# EAGLE board converter adapter - Copy (EAGLE 6.4)
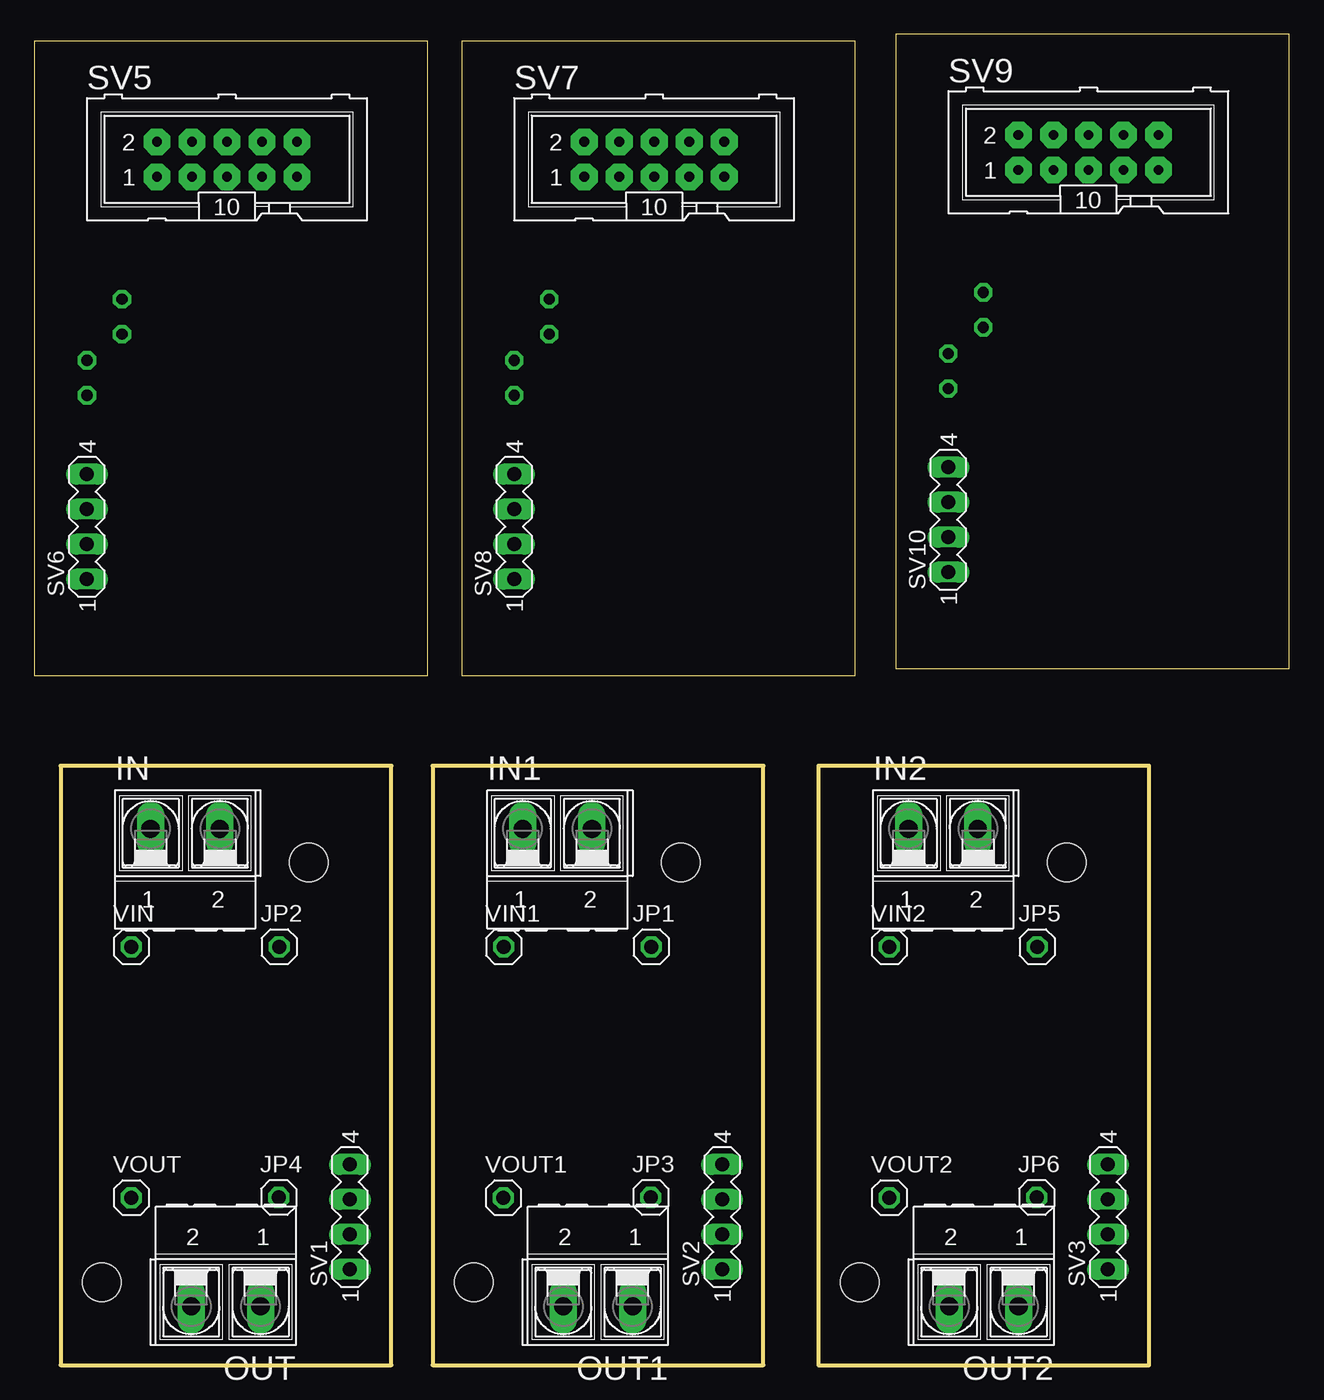
[diagram p0: board, top side]
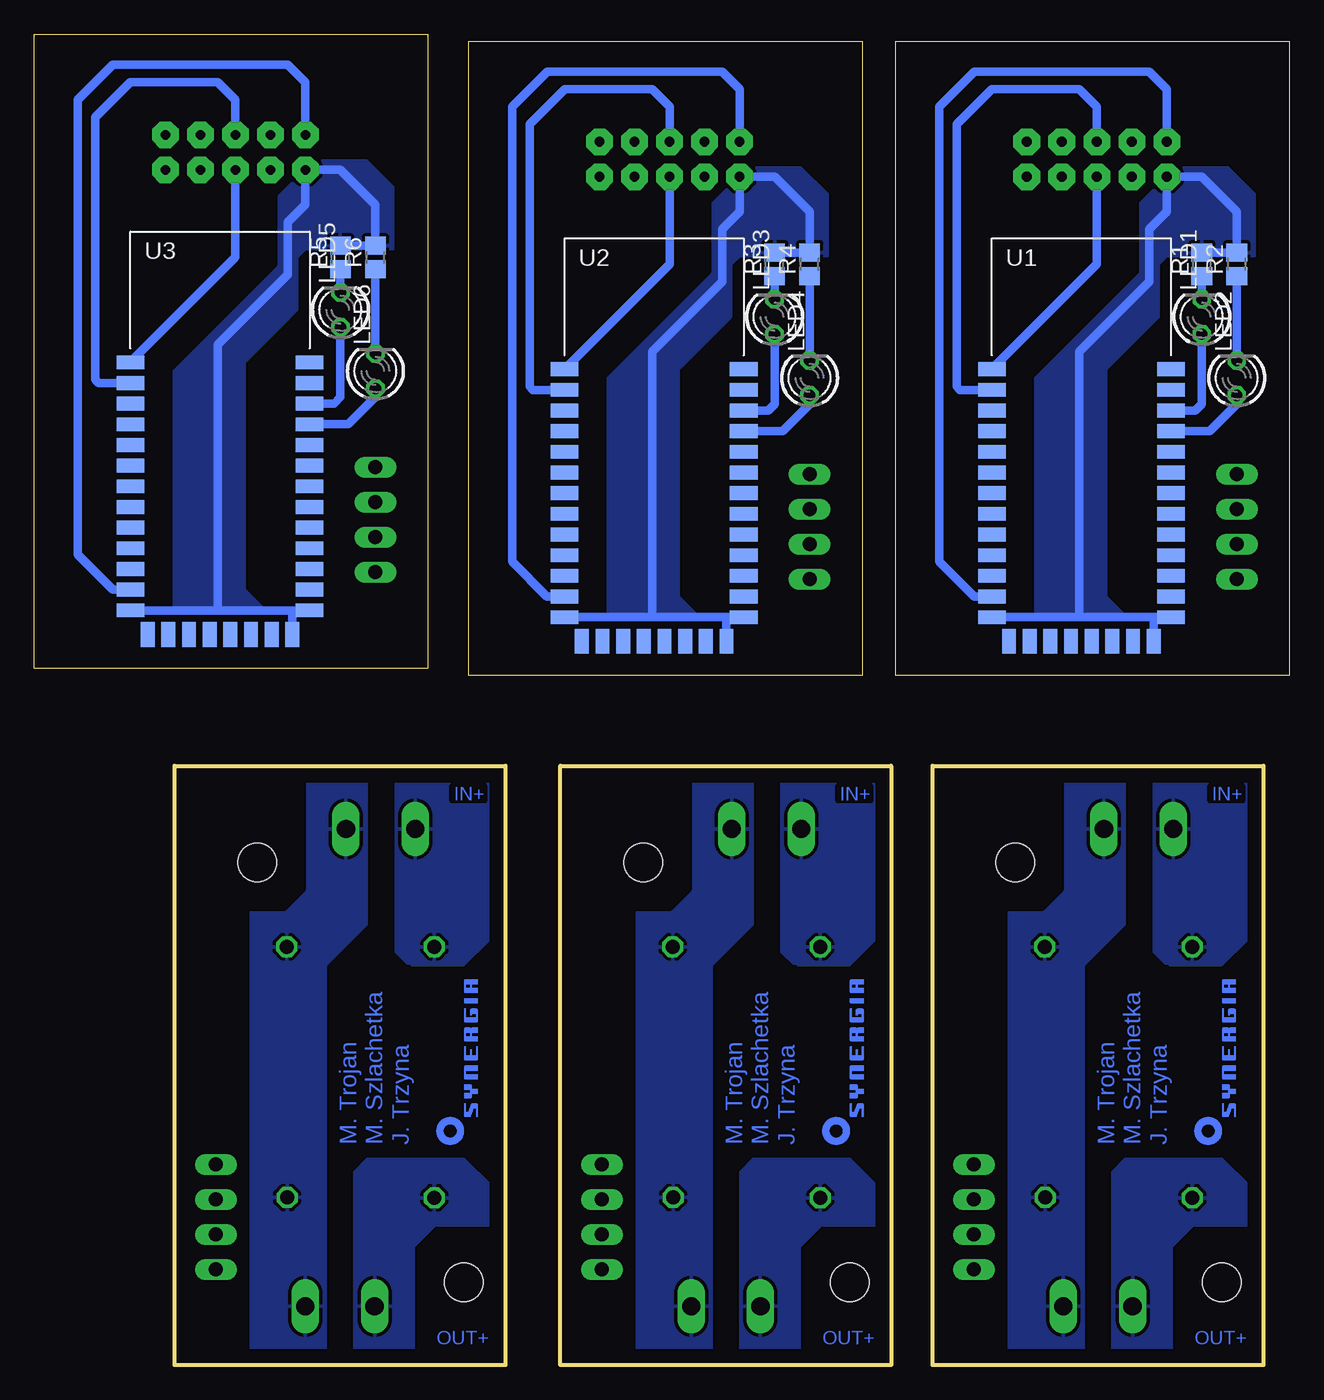
[diagram p1: board, bottom side, seen from below]

Size 91.06 x 96.58 mm. Coordinates in mm from the lower left corner, seen from the top.
Outline: 1.89,0 25.89,0 25.89,43.5 1.89,43.5 1.89,0
Outline: 28.89,0 52.89,0 52.89,43.5 28.89,43.5 28.89,0
Outline: 56.89,0 80.89,0 80.89,43.5 56.89,43.5 56.89,0
Outline: 0,50.06 28.55,50.06 28.55,96.08 0,96.08 0,50.06
Outline: 31,50.06 59.55,50.06 59.55,96.08 31,96.08 31,50.06
Outline: 62.5,50.56 91.06,50.56 91.06,96.58 62.5,96.58 62.5,50.56
Copper layers (1*16): Top 0.035mm / dielectric 1.5mm / Bottom 0.035mm
Design rules "default": minimum track width 10mil, minimum drill 24mil, track to track 8mil, track to pad 8mil, pad to pad 8mil, via to via 8mil, smd to smd 8mil, copper to edge 40mil, drill to drill 8mil, minimum pad ring 10mil, minimum via ring 8mil, stop-mask expansion 4mil, vias tented up to drill 0mil, thermal gap 10mil
Holes 2.8 mm at 4.89,6 19.89,36.5 31.89,6 46.89,36.5 59.89,6 74.89,36.5

## Footprints (pad centres in the part's own frame; a part is rotated, then mirrored left to right if it is on the bottom)
AK500/2-H = drill 1.321 long: 1 -2.515,0; 2 2.515,0
1X01 = drill 1.016 octagon: 1 0,0
LED3MM = drill 0.813 octagon: A -1.27,0; K 1.27,0
R0805 = smd 1.3 x 1.5: 1 -0.85,0; 2 0.85,0
MA04-1 = drill 1.016 long: 1 -3.81,0; 2 -1.27,0; 3 1.27,0; 4 3.81,0
ML10 = drill 0.7 pad 1.93 octagon: 1 -5.08,-1.27; 2 -5.08,1.27; 3 -2.54,-1.27; 4 -2.54,1.27; 5 0,-1.27; 6 0,1.27; 7 2.54,-1.27; 8 2.54,1.27; 9 5.08,-1.27; 10 5.08,1.27
BLUETOOTH_SMD = smd 2 x 1: 1 0,0; 2 0,-1.5; 3 0,-3; 4 0,-4.5; 5 0,-6; 6 0,-7.5; 7 0,-9; 8 0,-10.5; 9 0,-12; 10 0,-13.5; 11 0,-15; 12 0,-16.5; 13 0,-18; 22 13,-18; 23 13,-16.5; 24 13,-15; 25 13,-13.5; 26 13,-12; 27 13,-10.5; 28 13,-9; 29 13,-7.5; 30 13,-6; 31 13,-4.5; 32 13,-3; 33 13,-1.5; 34 13,0 | smd 1 x 1.8: 14 1.25,-19.75; 15 2.75,-19.75; 16 4.25,-19.75; 17 5.75,-19.75; 18 7.25,-19.75; 19 8.75,-19.75; 20 10.25,-19.75; 21 11.75,-19.75

## Placement (x,y rotation side)
IN  [AK500/2-H]  10.94,38.92 0 top
IN1  [AK500/2-H]  37.94,38.92 0 top
IN2  [AK500/2-H]  65.94,38.92 0 top
JP1  [1X01]  44.75,30.36 0 top
JP2  [1X01]  17.75,30.36 0 top
JP3  [1X01]  44.72,12.16 0 top
JP4  [1X01]  17.72,12.16 0 top
JP5  [1X01]  72.75,30.36 0 top
JP6  [1X01]  72.72,12.16 0 top
LED1  [LED3MM]  6.35,76.09 90 bottom
LED2  [LED3MM]  3.81,71.65 90 bottom
LED3  [LED3MM]  37.35,76.09 90 bottom
LED4  [LED3MM]  34.81,71.65 90 bottom
LED5  [LED3MM]  68.85,76.59 90 bottom
LED6  [LED3MM]  66.31,72.15 90 bottom
OUT  [AK500/2-H]  13.89,4.26 180 top
OUT1  [AK500/2-H]  40.89,4.26 180 top
OUT2  [AK500/2-H]  68.89,4.26 180 top
R1  [R0805]  6.35,79.91 90 bottom
R2  [R0805]  3.81,79.91 90 bottom
R3  [R0805]  37.35,79.91 90 bottom
R4  [R0805]  34.81,79.91 90 bottom
R5  [R0805]  68.85,80.41 90 bottom
R6  [R0805]  66.31,80.41 90 bottom
SV1  [MA04-1]  22.89,10.75 90 top
SV2  [MA04-1]  49.89,10.75 90 top
SV3  [MA04-1]  77.89,10.75 90 top
SV5  [ML10]  13.97,87.53 0 top
SV6  [MA04-1]  3.81,60.85 90 top
SV7  [ML10]  44.97,87.53 0 top
SV8  [MA04-1]  34.81,60.85 90 top
SV9  [ML10]  76.47,88.03 0 top
SV10  [MA04-1]  66.31,61.35 90 top
U1  HC_05  [BLUETOOTH_SMD]  21.59,72.28 0 bottom
U2  HC_05  [BLUETOOTH_SMD]  52.59,72.28 0 bottom
U3  HC_05  [BLUETOOTH_SMD]  84.09,72.78 0 bottom
U$1  [SYNERGIA_12MM]  3.89,16 90 bottom
U$2  [SYNERGIA_12MM]  30.89,16 90 bottom
U$3  [SYNERGIA_12MM]  58.89,16 90 bottom
VIN  [1X01]  7.04,30.36 0 top
VIN1  [1X01]  34.04,30.36 0 top
VIN2  [1X01]  62.04,30.36 0 top
VOUT  [1X01]  7.03,12.14 0 top
VOUT1  [1X01]  34.03,12.14 0 top
VOUT2  [1X01]  62.03,12.14 0 top

## Library data of the parts
IN IN1 IN2 OUT OUT1 OUT2 = con-ptr500; OC_FARNELL: unknown; OC_NEWARK: unknown
JP1-JP6 VIN VIN1 VIN2 VOUT VOUT1 VOUT2 = pinhead
LED1-LED6 = led
R1-R6 = resistor
SV1-SV3 SV6 SV8 SV10 = con-lstb; OC_FARNELL: unknown; OC_NEWARK: unknown
SV5 SV7 SV9 = con-harting-ml; OC_FARNELL: unknown; OC_NEWARK: unknown
U1-U3 = SerialPortBluetooth
U$1-U$3 = synergia_logo

## Nets
+3V1: SV5.2 U1.12
+3V2: SV7.2 U2.12
+3V3: SV9.2 U3.12
GND: IN.2 JP2.1 JP4.1 OUT.1
GND1: IN1.2 JP1.1 JP3.1 OUT1.1
GND2: IN2.2 JP5.1 JP6.1 OUT2.1
GND4: R1.2 R2.2 SV5.1 U1.13 U1.21 U1.22
GND5: R3.2 R4.2 SV7.1 U2.13 U2.21 U2.22
GND6: R5.2 R6.2 SV9.1 U3.13 U3.21 U3.22
N$1: OUT.2 VOUT.1
N$4: IN.1 VIN.1
N$5: OUT1.2 VOUT1.1
N$6: IN1.1 VIN1.1
N$9: OUT2.2 VOUT2.1
N$10: IN2.1 VIN2.1
N$17: SV5.5 U1.1
N$18: SV5.6 U1.2
N$19: LED2.A U1.31
N$20: LED1.A U1.32
N$21: LED1.K R1.1
N$22: LED2.K R2.1
N$23: SV7.5 U2.1
N$24: SV7.6 U2.2
N$25: LED4.A U2.31
N$26: LED3.A U2.32
N$27: LED3.K R3.1
N$28: LED4.K R4.1
N$29: SV9.5 U3.1
N$30: SV9.6 U3.2
N$31: LED6.A U3.31
N$32: LED5.A U3.32
N$33: LED5.K R5.1
N$34: LED6.K R6.1

## Tracks (layer width: path | path; a pad name or v marks a point on that pad's centre or on a via)
+3V1
  Bottom 0.61: SV5.2 8.89,92.61 10.16,93.88 22.86,93.88 25.4,91.33 25.4,58.31 22.87,55.78 U1.12
+3V2
  Bottom 0.61: SV7.2 39.89,92.61 41.16,93.88 53.86,93.88 56.4,91.33 56.4,58.31 53.87,55.78 U2.12
+3V3
  Bottom 0.61: SV9.2 71.39,93.11 72.66,94.38 85.36,94.38 87.9,91.83 87.9,58.81 85.37,56.28 U3.12
GND
  pour Bottom: 11.89,43 11.89,32 14.89,29 14.89,1 20.39,1 20.39,43
GND1
  pour Bottom: 38.89,43 38.89,32 41.89,29 41.89,1 47.39,1 47.39,43
GND2
  pour Bottom: 66.89,43 66.89,32 69.89,29 69.89,1 75.39,1 75.39,43
GND4
  Bottom 0.61: U1.22 9.84,54.28 | U1.21 9.84,54.28 | 9.84,54.28 U1.13 15.24,54.28 15.24,73.56 10.16,78.64 10.16,82.44 8.89,83.72 SV5.1 6.35,86.25 3.81,83.72 R2.2 R1.2
  pour Bottom: 7.62,86.89 4.45,86.89 2.54,84.98 2.54,80.54 8.26,80.54 8.89,80.54 9.53,79.91 9.53,76.09 13.34,72.28 13.34,55.77 12.07,54.51 18.41,54.51 18.41,71.65 10.79,79.27 10.79,84.35 9.53,85.62 9.53,86.25 8.89,86.89
GND5
  Bottom 0.61: U2.22 40.84,54.28 | U2.21 40.84,54.28 | 40.84,54.28 U2.13 46.24,54.28 46.24,73.56 41.16,78.64 41.16,82.44 39.89,83.72 SV7.1 37.35,86.25 34.81,83.72 R4.2 R3.2
  pour Bottom: 38.62,86.89 35.45,86.89 33.54,84.98 33.54,80.54 39.26,80.54 39.89,80.54 40.52,79.91 40.52,76.09 44.34,72.28 44.34,55.77 43.06,54.51 49.41,54.51 49.41,71.65 41.8,79.27 41.8,84.35 40.52,85.62 40.52,86.25 39.89,86.89
GND6
  Bottom 0.61: U3.22 72.34,54.78 | U3.21 72.34,54.78 | 72.34,54.78 U3.13 77.74,54.78 77.74,74.06 72.66,79.14 72.66,82.94 71.39,84.22 SV9.1 68.85,86.75 66.31,84.22 R6.2 R5.2
  pour Bottom: 70.12,87.39 66.95,87.39 65.04,85.48 65.04,81.04 70.75,81.04 71.39,81.04 72.03,80.41 72.03,76.59 75.83,72.78 75.83,56.27 74.56,55.01 80.92,55.01 80.92,72.15 73.3,79.77 73.3,84.85 72.03,86.12 72.03,86.75 71.39,87.39
N$1
  pour Bottom: 12.89,1 12.89,14 11.89,15 4.89,15 2.89,13 2.89,1
N$2
  cutout Bottom: 7.39,0.5 8.39,0.5 8.39,8.5 6.89,10 2.89,10 2.89,1 3.39,0.5
N$3
  cutout Bottom: 16.39,42.5 16.39,34.5 17.89,33 22.39,33 22.39,42.5
N$4
  pour Bottom: 9.89,43 9.89,30 8.89,29 4.89,29 2.89,31 2.89,42 3.89,43
N$5
  pour Bottom: 39.89,1 39.89,14 38.89,15 31.89,15 29.89,13 29.89,1
N$6
  pour Bottom: 36.89,43 36.89,30 35.89,29 31.89,29 29.89,31 29.89,42 30.89,43
N$7
  cutout Bottom: 34.39,0.5 35.39,0.5 35.39,8.5 33.89,10 29.89,10 29.89,1 30.39,0.5
N$8
  cutout Bottom: 43.39,42.5 43.39,34.5 44.89,33 49.39,33 49.39,42.5
N$9
  pour Bottom: 67.89,1 67.89,14 66.89,15 59.89,15 57.89,13 57.89,1
N$10
  pour Bottom: 64.89,43 64.89,30 63.89,29 59.89,29 57.89,31 57.89,42 58.89,43
N$11
  cutout Bottom: 58.39,0.5 63.39,0.5 63.39,8.5 61.89,10 57.89,10 57.89,1
N$12
  cutout Bottom: 71.39,42.5 71.39,34.5 72.89,33 77.39,33 77.39,42.5
N$17
  Bottom 0.61: U1.1 13.97,79.91 SV5.5
N$18
  Bottom 0.61: U1.2 23.9,70.78 24.13,71.02 24.13,90.06 21.59,92.61 15.24,92.61 13.97,91.33 SV5.6
N$19
  Bottom 0.61: LED2.A 3.81,69.75 5.77,67.78 U1.31
N$20
  Bottom 0.61: LED1.A 6.35,69.75 6.81,69.28 U1.32
N$21
  Bottom 0.61: R1.1 LED1.K
N$22
  Bottom 0.61: LED2.K R2.1
N$23
  Bottom 0.61: U2.1 44.97,79.91 SV7.5
N$24
  Bottom 0.61: U2.2 54.9,70.78 55.13,71.02 55.13,90.06 52.59,92.61 46.24,92.61 44.97,91.33 SV7.6
N$25
  Bottom 0.61: LED4.A 34.81,69.75 36.77,67.78 U2.31
N$26
  Bottom 0.61: LED3.A 37.35,69.75 37.81,69.28 U2.32
N$27
  Bottom 0.61: R3.1 LED3.K
N$28
  Bottom 0.61: LED4.K R4.1
N$29
  Bottom 0.61: U3.1 76.47,80.41 SV9.5
N$30
  Bottom 0.61: U3.2 86.4,71.28 86.63,71.52 86.63,90.56 84.09,93.11 77.74,93.11 76.47,91.83 SV9.6
N$31
  Bottom 0.61: LED6.A 66.31,70.25 68.27,68.28 U3.31
N$32
  Bottom 0.61: LED5.A 68.85,70.25 69.31,69.78 U3.32
N$33
  Bottom 0.61: R5.1 LED5.K
N$34
  Bottom 0.61: LED6.K R6.1

## Text on the board
Bottom: IN+ | IN+ | IN+ | M. Trojan / M. Szlachetka / J. Trzyna | M. Trojan / M. Szlachetka / J. Trzyna | M. Trojan / M. Szlachetka / J. Trzyna | OUT+ | OUT+ | OUT+